# Altium PCB HandPCBnoLine.PcbDoc
Units mm, origin at the board's own origin, x right, y up, seen from the top; angles counter-clockwise.
Board outline 152.4 x 101.6 mm, 2 copper layers (Top Layer, Bottom Layer); 8 components, 21 nets, 69 pads, 0 vias.
Unrouted connection lines stored in the file: 46.
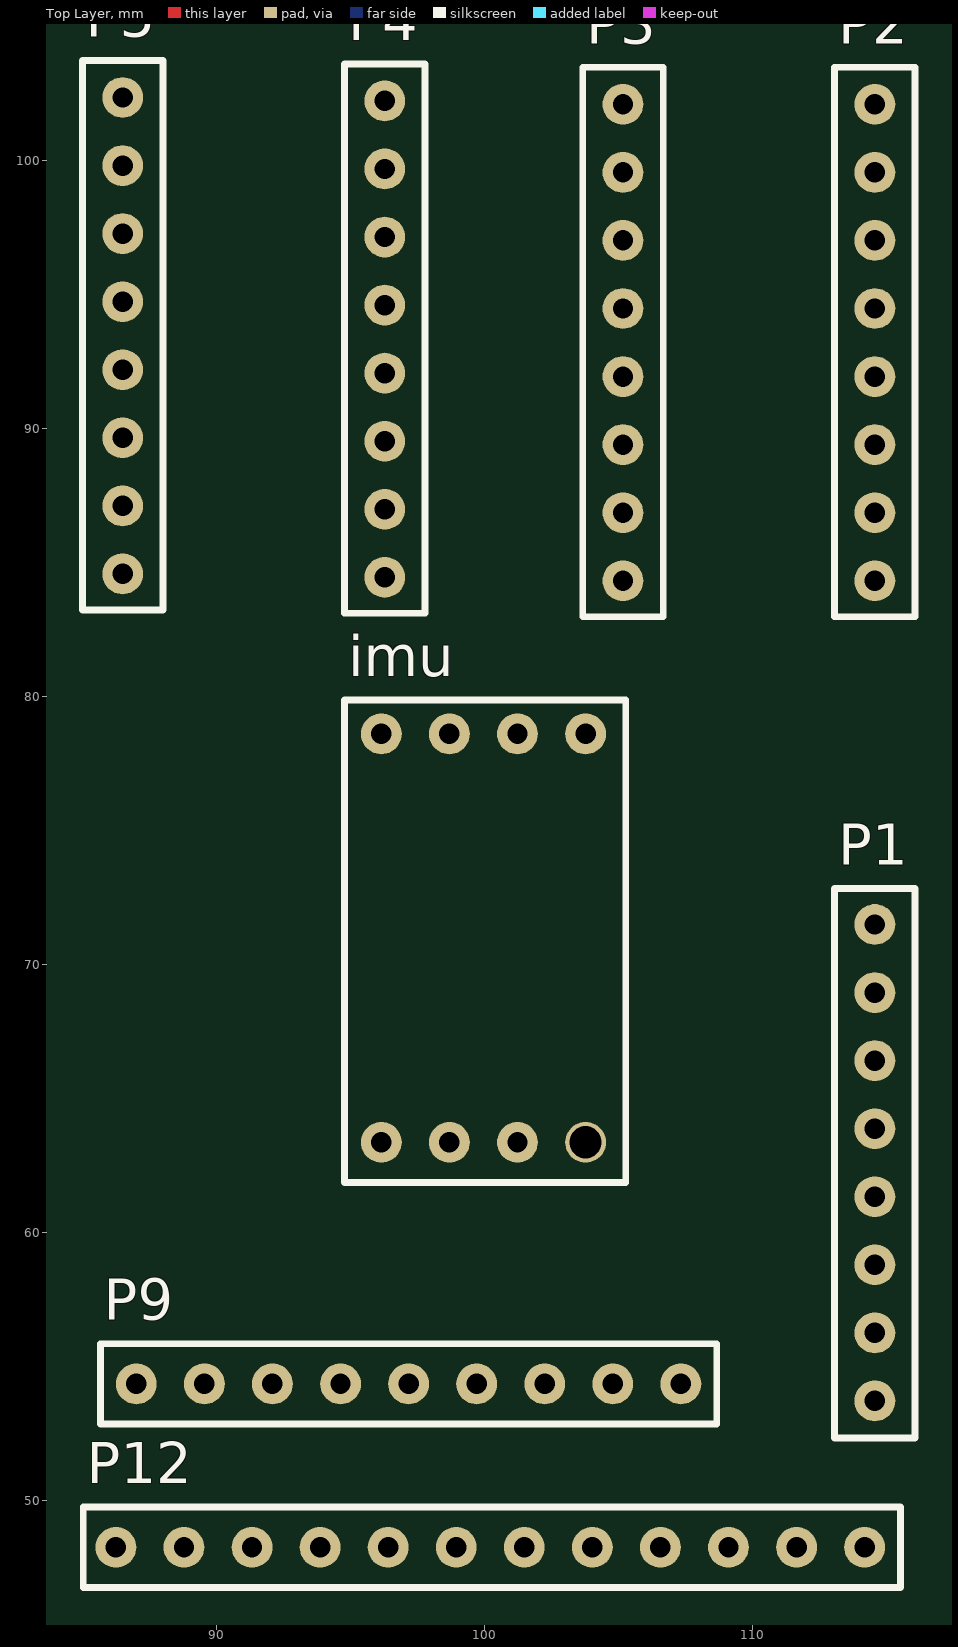
[diagram p0: Top Layer view]
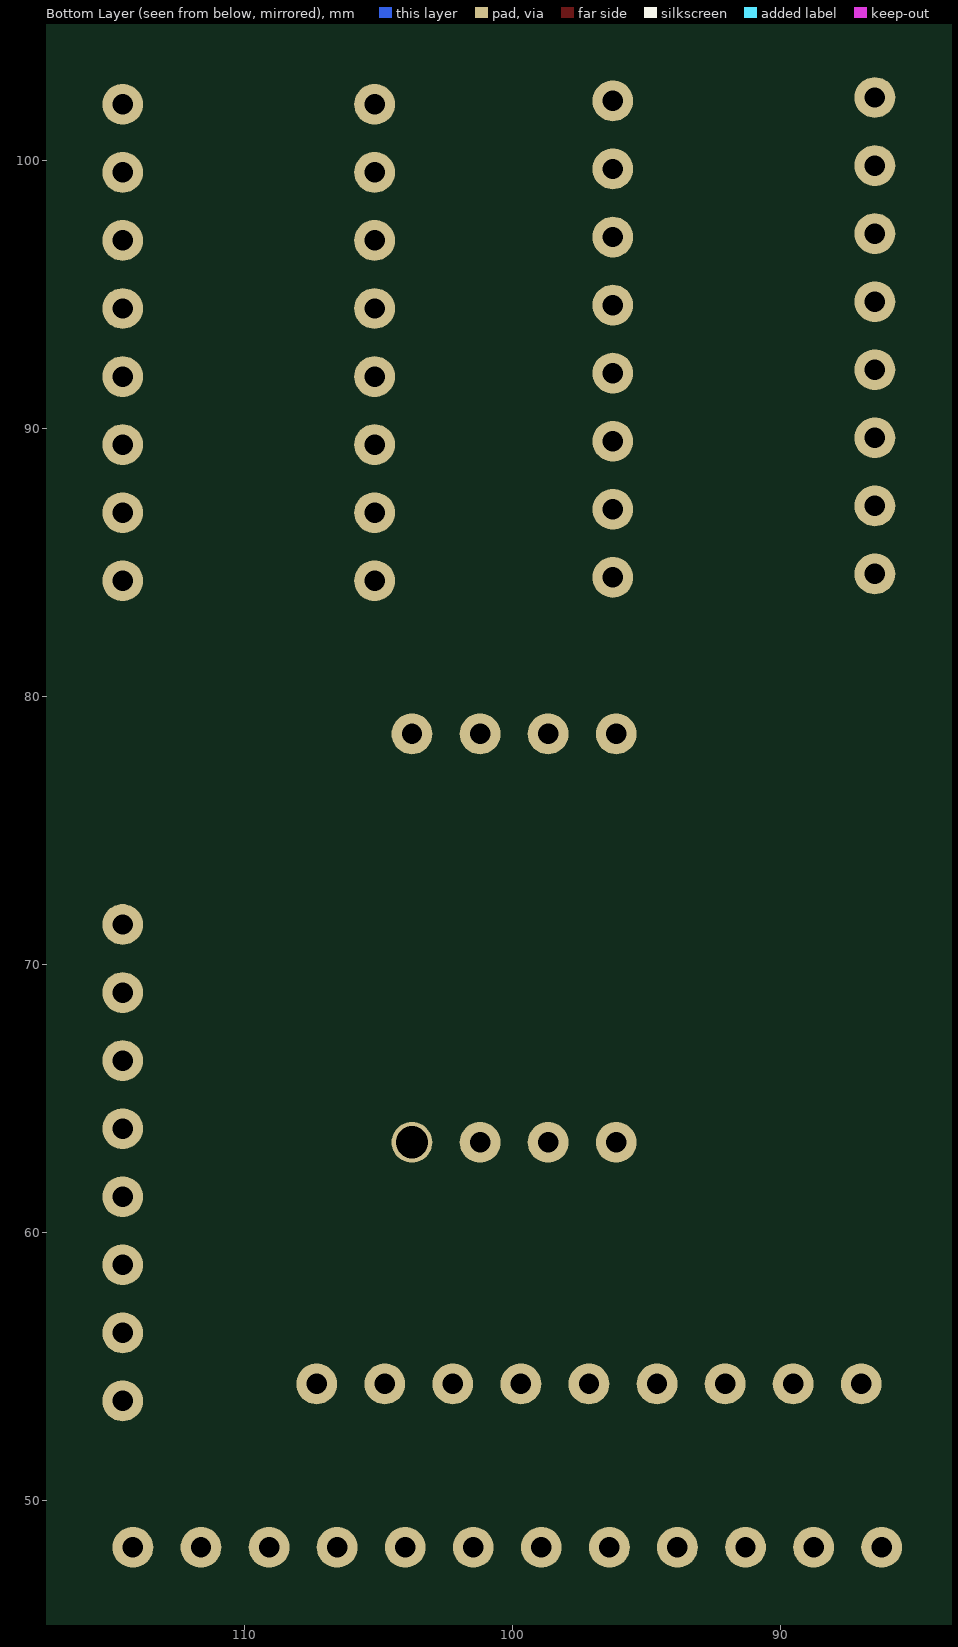
[diagram p1: Bottom Layer view, seen from below]

## Layer stack, top to bottom
Top Solder: solder mask 0.0102, Solder Resist, Dk 3.5
Top Layer: signal copper 0.0356
Dielectric 1: dielectric 0.32, FR-4, Dk 4.8
Bottom Layer: signal copper 0.0356
Bottom Solder: solder mask 0.0102, Solder Resist, Dk 3.5

## Board outline
25.4,25.4 177.8,25.4 177.8,127 25.4,127

## Design rules (kind name [scope] priority, off if disabled: settings)
Clearance [All] p1: gap=0.254 ignorepadtopadclearanceinfootprint=FALSE except(0: Arc-Hole Track-Hole SMDPad-Hole THPad-Hole Via-Hole Fill-Hole Poly-Hole Region-Hole Text-Hole)
PolygonConnect [All] p1: connectstyle=Relief reliefconductorwidth=0.254 reliefentries=4 polygonreliefangle="90 Angle" airgapwidth=0.254
RoomDefinition HandPcb [InComponentClass('HandPcb')] p1: confinementstyle=ConfineIn formatcopy=TRUE lockcomponents=FALSE outline 83.439,45.466 118.11,45.466 118.11,104.013 83.439,104.013
RoutingVias [All] p1: holewidth=0.711 width=1.27 viastyle="Through Hole" minholewidth=0.711 minwidth=1.27 maxholewidth=0.711 maxwidth=1.27
SolderMaskExpansion [All] p1: expansion=0.102 istentingtop=FALSE
Width [All] p1: maxlimit=0.254 minlimit=0.254 preferedwidth=0.254
30 further rules are at their usual default settings.

## Components (designator, comment, footprint, x,y, rotation, side; value= is the part's Value field where it differs from the comment)
imu "IMU" MPU9250 103.759,63.373 r180 top
P1 "8P" 8P 114.554,61.341 r270 top
P2 "8P" 8P 114.554,94.488 r90 top
P3 "8P" 8P 105.156,94.488 r90 top
P4 "8P" 8P 96.266,94.615 r90 top
P5 "8P" 8P 86.487,94.742 r90 top
P9 "9P" 9p 97.155,54.356 r180 top
P12 "12P" 12P 104.013,48.26 r180 top

## Footprints (in the part's own frame and the unit in brackets; to place one, negate y for a bottom-side part, rotate by r counter-clockwise, add the part's x,y. Pads: shape width x height; smd on the part's side, far side on the other; paste and mask are expansions set on the pad)
8P [mil]
  round 60 hole 30: 1(-400,0) 2(-300,0) 3(-200,0) 4(-100,0) 5(0,0) 6(100,0) 7(200,0) 8(300,0)
  silkscreen extent -453,-59 354,59
9p [mil]
  round 60 hole 30: 1(-400,0) 2(-300,0) 3(-200,0) 4(-100,0) 5(0,0) 6(100,0) 7(200,0) 8(300,0) 9(400,0)
  silkscreen extent -453,-59 453,59
12P [mil]
  round 60 hole 30: 1(-400,0) 2(-300,0) 3(-200,0) 4(-100,0) 5(0,0) 6(100,0) 7(200,0) 8(300,0) 9(400,0) 10(500,0) 11(600,0) 12(700,0)
  silkscreen extent -453,-59 748,59
MPU9250 [mil]
  round 60 hole 47.24: 1(0,0)
  round 60 hole 30: 2(100,0) 3(200,0) 4(300,0) 5(0,-600) 6(100,-600) 7(200,-600) 8(300,-600)
  silkscreen extent -59,-650 354,59

## Nets (pads, with @x,y where several pads share a name; then routed paths per layer and width w, separated by ;. In a path a pad name is that pad's centre, name@x,y a point inside that pad or via, vN(x,y) a via of type N, cw(c..) or ccw(c..) an arc to the next point about the centre after c; other vN are vias at no path point)
Netimu_1: imu.1 P1.1 P2.1 P3.1 P4.1 P5.1 P9.1
Netimu_2: imu.2 P1.2 P2.2 P3.2 P4.2 P5.2 P9.2
Netimu_3: imu.3 P1.3 P2.3 P3.3 P4.3 P5.3 P9.3
Netimu_4: imu.4 P1.4 P2.4 P3.4 P4.4 P5.4 P9.4
Netimu_6: imu.6 P1.5 P2.5 P3.5 P4.5 P5.5 P9.5
Netimu_7: imu.7 P12.12
NetP1_6: P1.6 P9.6
NetP1_7: P1.7 P9.7
NetP1_8: P1.8 P9.8
NetP2_6: P2.6 P9.9
NetP2_7: P2.7 P12.1
NetP2_8: P2.8 P12.2
NetP3_6: P3.6 P12.3
NetP3_7: P3.7 P12.4
NetP3_8: P3.8 P12.5
NetP4_6: P4.6 P12.6
NetP4_7: P4.7 P12.7
NetP4_8: P4.8 P12.8
NetP5_6: P5.6 P12.9
NetP5_7: P5.7 P12.10
NetP5_8: P5.8 P12.11
pads on no net: imu.5 imu.8